# EAGLE board Nusbio Test GPIOS Extension (EAGLE 9.6.2)
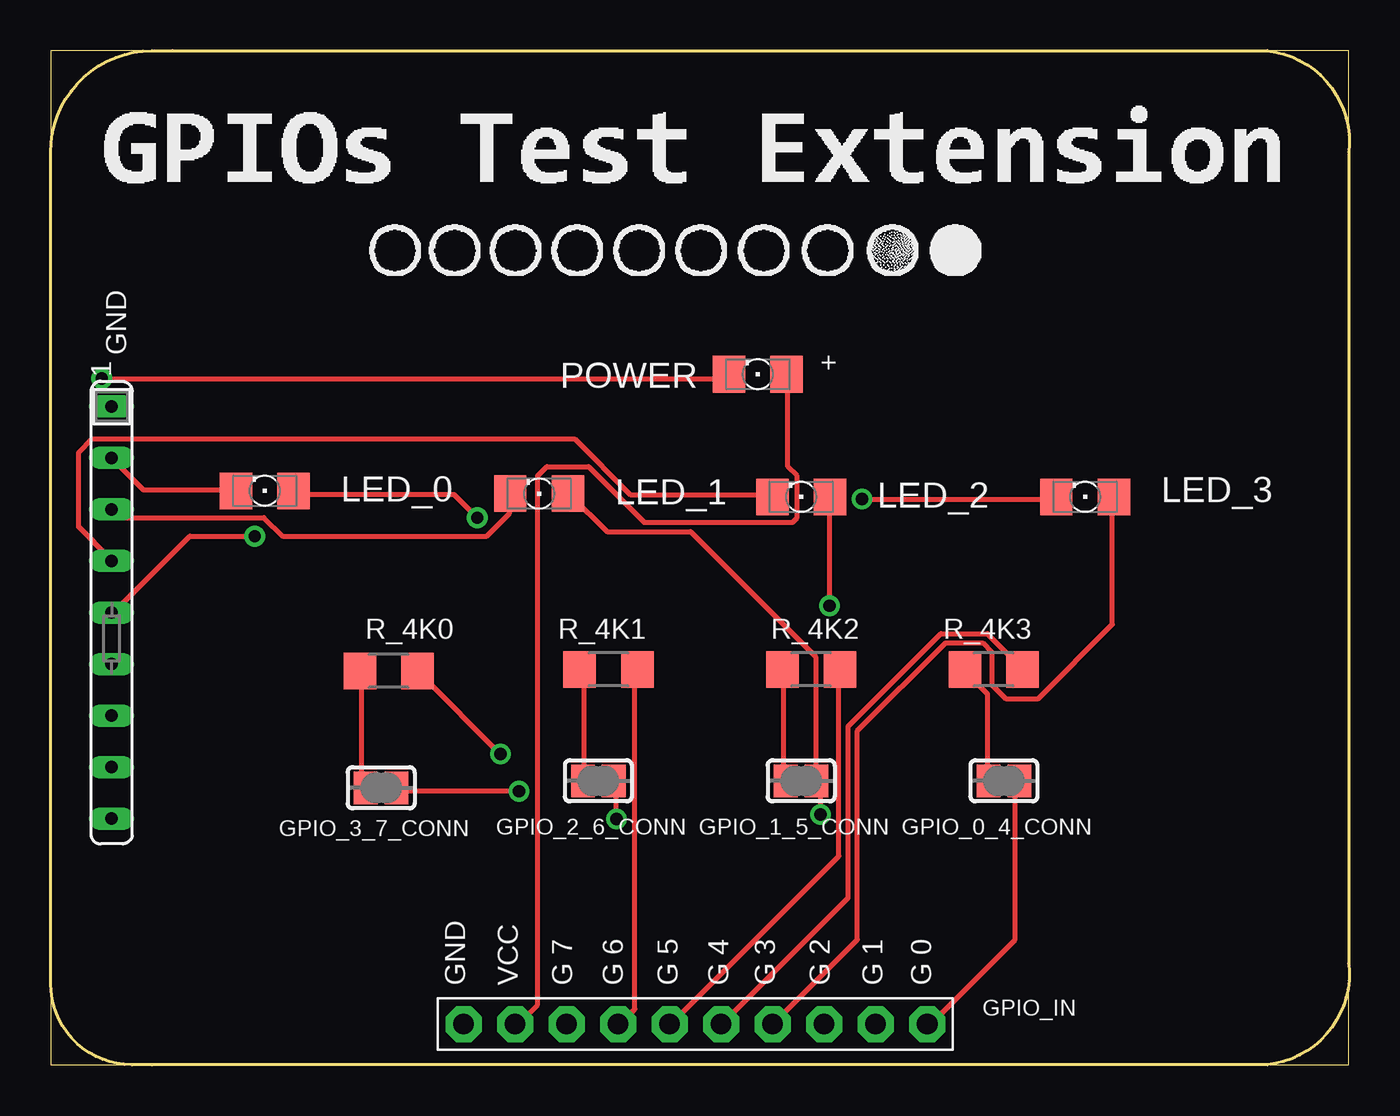
[diagram p0: board, top side]
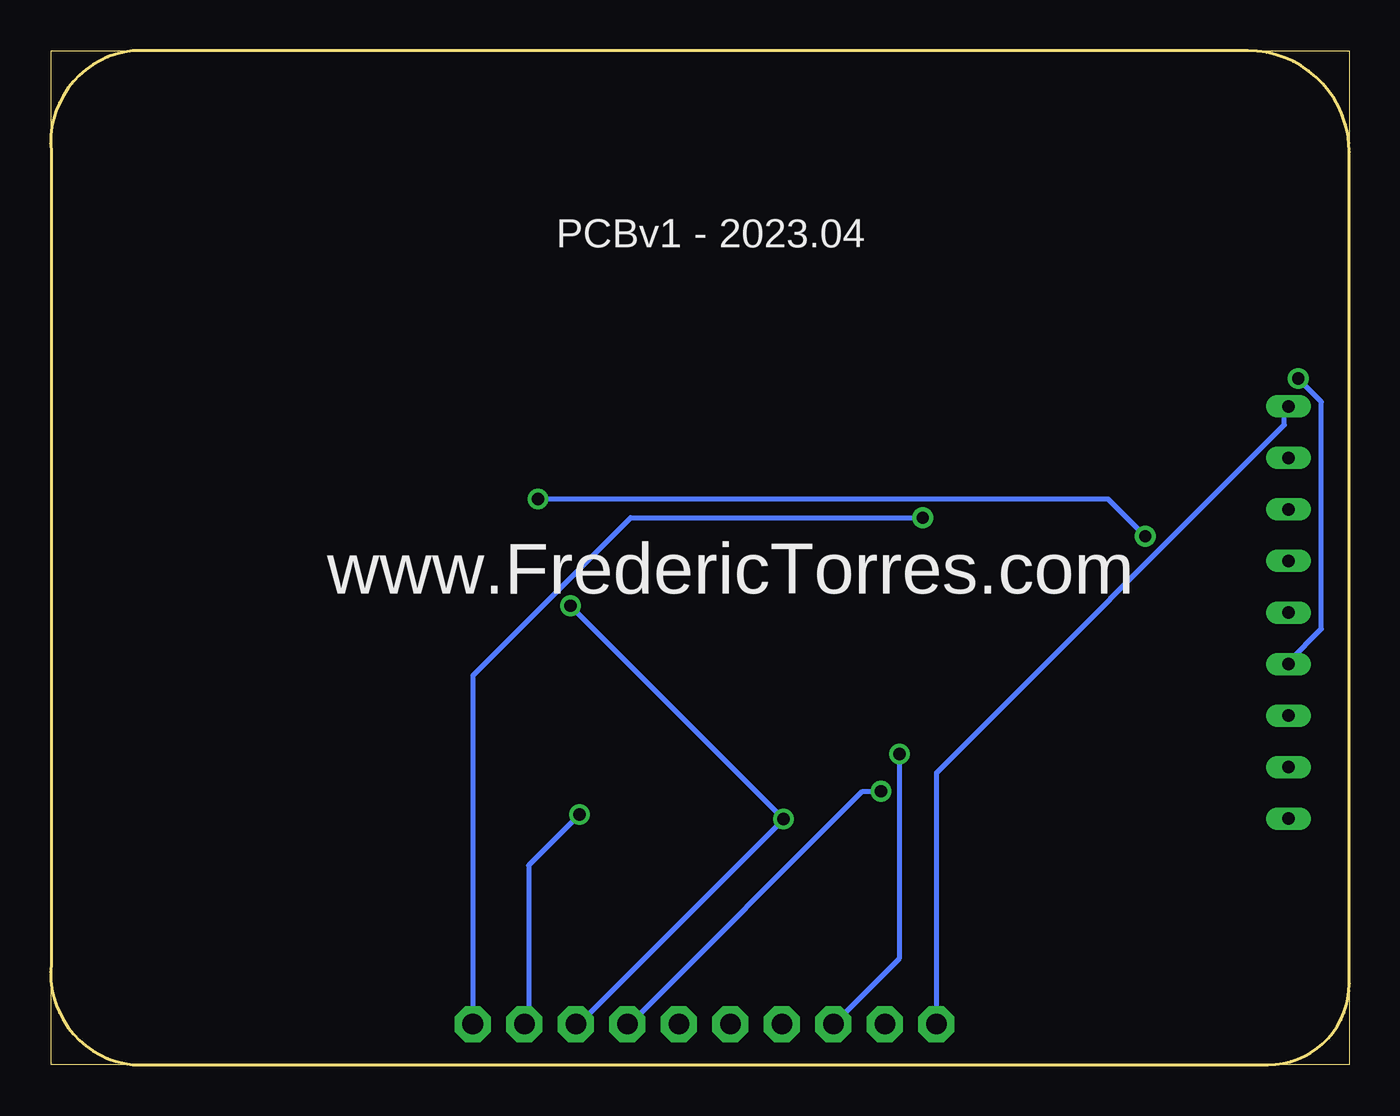
[diagram p1: board, bottom side, seen from below]

Size 64.03 x 50 mm. Coordinates in mm from the lower left corner, seen from the top.
Outline: 5,0 0,0 0,4
Outline: 60,0 64,0 64,5
Outline: 64,45 64,50 60,50
Outline: 6,50 0,50 0,45
Outline: 0,4 0,45
Outline: 0,45 arc-90 5,50 6,50
Outline: 6,50 60,50
Outline: 60,50 arc-90 64,45
Outline: 64,45 64,5
Outline: 64,5 arc-90 60,0
Outline: 60,0 5,0
Outline: 5,0 4,0 arc-90 0,4
Copper layers (1*16): Top 0.035mm / dielectric 1.5mm / Bottom 0.035mm
Design rules "default": minimum track width 10mil, minimum drill 24mil, track to track 8mil, track to pad 8mil, pad to pad 8mil, via to via 8mil, smd to smd 8mil, copper to edge 40mil, drill to drill 8mil, minimum pad ring 10mil, minimum via ring 8mil, stop-mask expansion 4mil, vias tented up to drill 0mil, thermal gap 10mil

## Footprints (pad centres in the part's own frame; a part is rotated, then mirrored left to right if it is on the bottom)
SOLDERJUMPER_REFLOW = smd 1.168 x 1.6: 1 -0.762,0; 2 0.762,0
1X10-BIG = drill 1.016 pad 1.778 octagon: 1 -11.43,0; 2 -8.89,0; 3 -6.35,0; 4 -3.81,0; 5 -1.27,0; 6 1.27,0; 7 3.81,0; 8 6.35,0; 9 8.89,0; 10 11.43,0
1206 = smd 1.6 x 1.803: A -1.422,0; C 1.422,0
R1206 = smd 1.6 x 1.803: 1 -1.422,0; 2 1.422,0
SIP9 = drill 0.6 long: 1 -11.46,0; 2 -8.92,0; 3 -6.38,0; 4 -3.84,0; 5 -1.3,0; 6 1.24,0; 7 3.78,0; 8 6.32,0; 9 8.86,0

## Placement (x,y rotation side)
GPIO_0_4_CONN  [SOLDERJUMPER_REFLOW]  47,14 180 top
GPIO_1_5_CONN  [SOLDERJUMPER_REFLOW]  37,14 180 top
GPIO_2_6_CONN  [SOLDERJUMPER_REFLOW]  27,14 180 top
GPIO_3_7_CONN  [SOLDERJUMPER_REFLOW]  16.29,13.66 180 top
GPIO_IN  PINHD-1X10  [1X10-BIG]  31.79,2 180 top
LED_0  [1206]  10.55,28.3 180 top
LED_1  [1206]  24.08,28.16 180 top
LED_2  [1206]  37,28 180 top
LED_3  [1206]  51,28 180 top
LED_POWER  [1206]  34.87,34.05 180 top
R_4K0  [R1206]  16.67,19.43 0 top
R_4K1  [R1206]  27.5,19.5 0 top
R_4K2  [R1206]  37.5,19.5 0 top
R_4K3  [R1206]  46.5,19.5 0 top
R_ARRAY  [SIP9]  3,21 270 top

## Library data of the parts
GPIO_0_4_CONN GPIO_1_5_CONN GPIO_2_6_CONN GPIO_3_7_CONN = microbuilder
GPIO_IN LED_0 LED_1-LED_3 LED_POWER R_4K0 R_4K1-R_4K3 = adafruit
R_ARRAY = resistor-sip

## Nets
GND: GPIO_IN.10 R_ARRAY.1
GPIO0: GPIO_0_4_CONN.1 GPIO_IN.1 LED_0.A
GPIO1: GPIO_1_5_CONN.1 GPIO_IN.2 LED_1.A
GPIO2: GPIO_2_6_CONN.1 GPIO_IN.3 LED_2.A
GPIO3: GPIO_3_7_CONN.1 GPIO_IN.4 LED_3.A
GPIO4: GPIO_IN.5 R_4K3.2
GPIO5: GPIO_IN.6 R_4K2.2
GPIO6: GPIO_IN.7 R_4K1.2
GPIO7: GPIO_IN.8 R_4K0.2
N$1: GPIO_3_7_CONN.2 R_4K0.1
N$2: GPIO_2_6_CONN.2 R_4K1.1
N$3: GPIO_1_5_CONN.2 R_4K2.1
N$4: GPIO_0_4_CONN.2 R_4K3.1
R_LED_0: LED_0.C R_ARRAY.2
R_LED_1: LED_1.C R_ARRAY.3
R_LED_2: LED_2.C R_ARRAY.4
R_LED_3: LED_3.C R_ARRAY.5
R_LED_PWR: LED_POWER.C R_ARRAY.6
VCC: GPIO_IN.9 LED_POWER.A

## Tracks (layer width: path | path; a pad name or v marks a point on that pad's centre or on a via)
GND
  Bottom 0.254: R_ARRAY.1 3.2,32.23 3.2,31.55 20.34,14.4 20.34,2.06 GPIO_IN.10
GPIO0  (via drill 0.61)
  Top 0.254: GPIO_0_4_CONN.1 47.55,13.95 47.55,6.17 43.43,2.06 GPIO_IN.1 | v21.03,26.98 19.89,28.12 12.12,28.12 LED_0.A
  Bottom 0.254: v21.03,26.98 35.43,26.98 43.2,19.2 43.2,2.06 GPIO_IN.1
GPIO1  (via drill 0.61)
  Top 0.254: LED_1.A 25.6,28.12 27.43,26.29 31.55,26.29 37.72,20.12 37.72,14.17 GPIO_1_5_CONN.1 37.95,13.95 v37.95,12.34
  Bottom 0.254: v37.95,12.34 40.46,9.83 40.46,2.06 GPIO_IN.2
GPIO2  (via drill 0.61)
  Top 0.254: v27.89,12.12 27.89,13.95 GPIO_2_6_CONN.1 | v38.41,22.63 38.41,27.89 LED_2.A
  Bottom 0.254: GPIO_IN.3 37.95,2.06 v27.89,12.12 v38.41,22.63
GPIO3  (via drill 0.61)
  Top 0.254: v23.09,13.49 17.14,13.49 GPIO_3_7_CONN.1 | LED_3.A 52.35,27.89 52.35,21.72 48.69,18.06 47.09,18.06 46.41,18.75 46.41,20.34 45.95,20.8 44.12,20.8 39.78,16.46 39.78,6.17 35.66,2.06 GPIO_IN.4
  Bottom 0.254: v23.09,13.49 24,13.49 35.43,2.06 GPIO_IN.4
GPIO4
  Top 0.254: R_4K3.2 47.78,19.66 46.18,21.26 43.89,21.26 39.32,16.69 39.32,8.23 33.15,2.06 GPIO_IN.5
GPIO5
  Top 0.254: R_4K2.2 38.86,19.43 38.86,10.29 30.63,2.06 GPIO_IN.6
GPIO6
  Top 0.254: R_4K1.2 28.8,19.43 28.8,2.74 28.12,2.06 GPIO_IN.7
GPIO7  (via drill 0.61)
  Top 0.254: v22.17,15.32 18.29,19.2 R_4K0.2
  Bottom 0.254: v22.17,15.32 22.17,5.26 25.38,2.06 GPIO_IN.8
N$1
  Top 0.254: GPIO_3_7_CONN.2 15.32,13.72 15.32,19.2 R_4K0.1
N$2
  Top 0.254: GPIO_2_6_CONN.2 26.29,14.17 26.29,19.43 R_4K1.1
N$3
  Top 0.254: GPIO_1_5_CONN.2 36.12,14.17 36.12,19.43 R_4K2.1
N$4
  Top 0.254: GPIO_0_4_CONN.2 46.18,14.17 46.18,18.29 45.03,19.43 R_4K3.1
R_LED_0
  Top 0.254: LED_0.C 8.91,28.35 4.57,28.35 3.2,29.72 R_ARRAY.2
R_LED_1
  Top 0.254: LED_1.C 22.63,28.12 22.63,27.2 21.49,26.06 11.43,26.06 10.52,26.98 3.43,26.98 3.2,27.2 R_ARRAY.3
R_LED_2
  Top 0.254: LED_2.C 35.43,28.12 28.57,28.12 25.83,30.86 2.06,30.86 1.37,30.18 1.37,26.52 2.97,24.92 R_ARRAY.4
R_LED_3  (via drill 0.61)
  Top 0.254: v40.01,27.89 49.38,27.89 LED_3.C | v10.06,26.06 6.86,26.06 3.2,22.4 R_ARRAY.5
  Bottom 0.254: v40.01,27.89 11.89,27.89 v10.06,26.06
R_LED_PWR  (via drill 0.61)
  Top 0.254: v2.52,33.83 33.38,33.83 LED_POWER.C
  Bottom 0.254: v2.52,33.83 1.37,32.69 1.37,21.49 2.97,19.89 R_ARRAY.6
VCC
  Top 0.254: LED_POWER.A 36.35,33.83 36.35,29.49 36.8,29.03 36.8,26.98 36.58,26.75 29.26,26.75 26.52,29.49 24.46,29.49 24,29.03 24,2.97 23.09,2.06 GPIO_IN.9

## Text on the board
tNames: GND | POWER | + | GND | VCC | G 7 | G 6 | G 5 | G 4 | G 3 | G 2 | G 1 | G 0
bNames: PCBv1 - 2023.04 | www.FredericTorres.com